# EAGLE board Placa 2 (EAGLE 7.2.0)
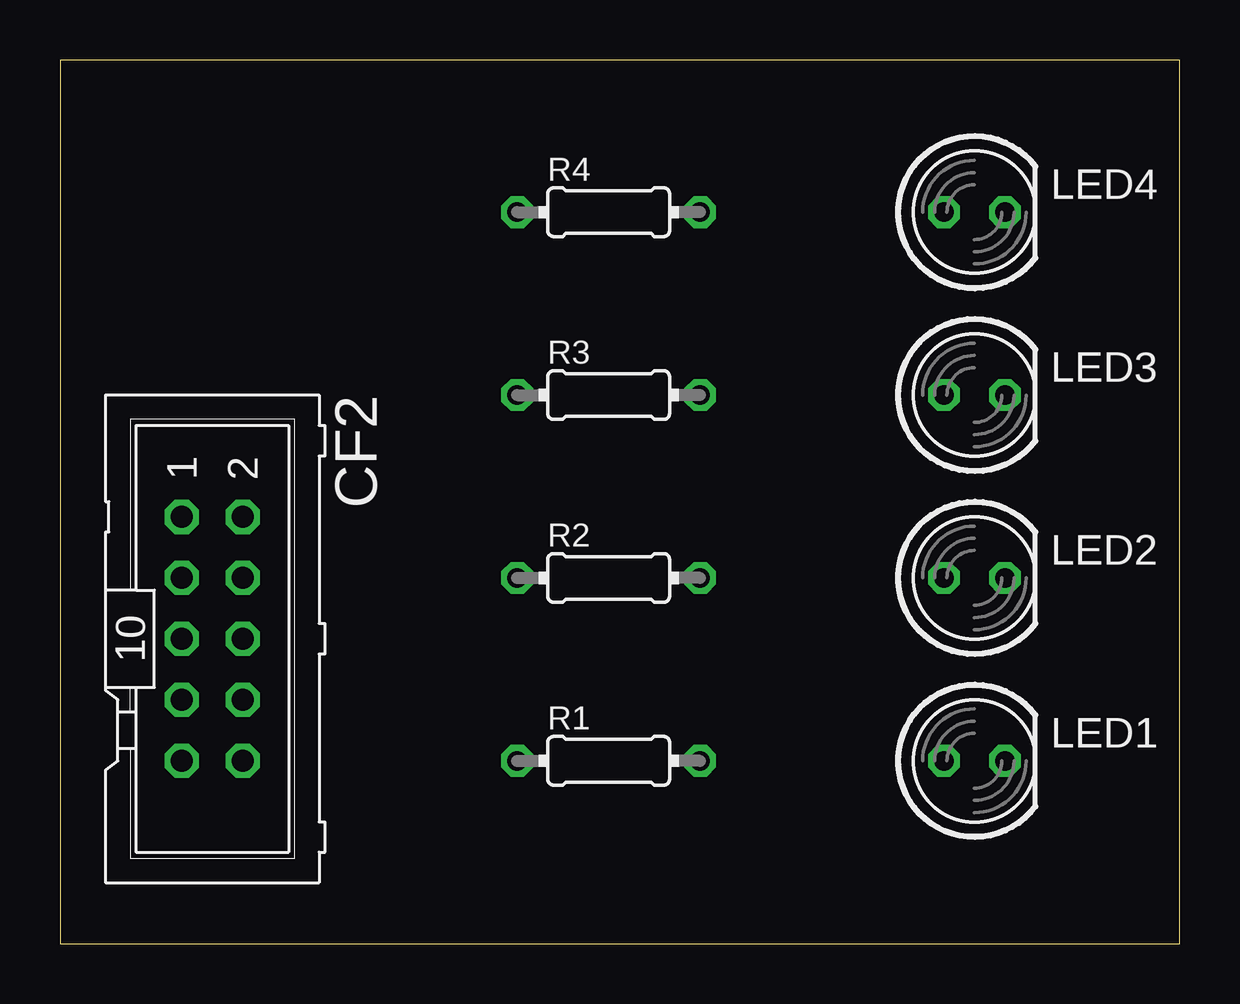
[diagram p0: board, top side]
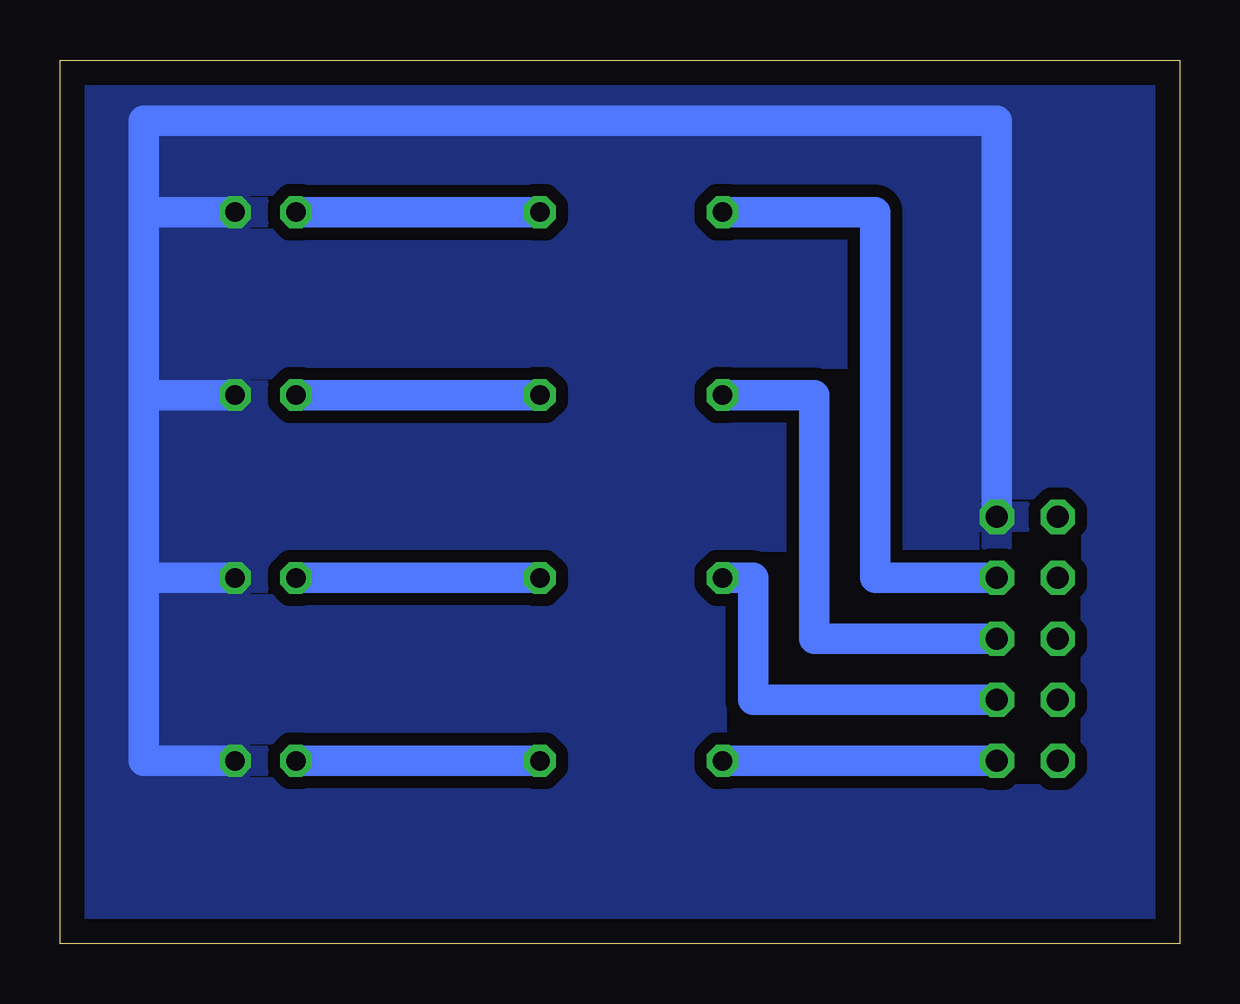
[diagram p1: board, bottom side, seen from below]

Size 46.66 x 36.82 mm. Coordinates in mm from the lower left corner, seen from the top.
Outline: 0,0 46.66,0 46.66,36.82 0,36.82 0,0
Copper layers (1*16): Top 0.035mm / dielectric 1.5mm / Bottom 0.035mm
Design rules "default *": minimum track width 10mil, minimum drill 24mil, track to track 20mil, track to pad 20mil, pad to pad 8mil, via to via 8mil, smd to smd 8mil, copper to edge 40mil, drill to drill 8mil, minimum pad ring 10mil, minimum via ring 8mil, stop-mask expansion 4mil, vias tented up to drill 0mil, thermal gap 10mil

## Footprints (pad centres in the part's own frame; a part is rotated, then mirrored left to right if it is on the bottom)
ML10 = drill 0.914 octagon: 1 -5.08,-1.27; 2 -5.08,1.27; 3 -2.54,-1.27; 4 -2.54,1.27; 5 0,-1.27; 6 0,1.27; 7 2.54,-1.27; 8 2.54,1.27; 9 5.08,-1.27; 10 5.08,1.27
LED5MM = drill 0.813 octagon: A -1.27,0; K 1.27,0
0204/7 = drill 0.813 octagon: 1 -3.81,0; 2 3.81,0

## Placement (x,y rotation side)
CF2  [ML10]  6.35,12.7 270 top
LED1  [LED5MM]  38.1,7.62 0 top
LED2  [LED5MM]  38.1,15.24 0 top
LED3  [LED5MM]  38.1,22.86 0 top
LED4  [LED5MM]  38.1,30.48 0 top
R1  220  [0204/7]  22.86,7.62 0 top
R2  220  [0204/7]  22.86,15.24 0 top
R3  220  [0204/7]  22.86,22.86 0 top
R4  220  [0204/7]  22.86,30.48 0 top

## Library data of the parts
CF2 = con-ml; OC_FARNELL: unknown; OC_NEWARK: unknown
LED1-LED4 = led
R1-R4 = rcl

## Nets
GND: CF2.2 LED1.K LED2.K LED3.K LED4.K
N$1: LED1.A R1.2
N$2: LED2.A R2.2
N$3: LED3.A R3.2
N$4: LED4.A R4.2
N$5: CF2.10 R1.1
N$6: CF2.8 R2.1
N$7: CF2.6 R3.1
N$8: CF2.4 R4.1

## Tracks (layer width: path | path; a pad name or v marks a point on that pad's centre or on a via)
GND
  Bottom 1.27: CF2.2 7.62,34.29 43.18,34.29 43.18,30.48 | 43.18,30.48 43.18,22.86 | 43.18,22.86 43.18,15.24 | 43.18,15.24 43.18,7.62 LED1.K | LED2.K 43.18,15.24 | LED3.K 43.18,22.86 | LED4.K 43.18,30.48
  pour Bottom: 0,36.83 0,0 45.72,0 45.72,36.83
N$1
  Bottom 1.27: R1.2 LED1.A
N$2
  Bottom 1.27: R2.2 LED2.A
N$3
  Bottom 1.27: LED3.A R3.2
N$4
  Bottom 1.27: LED4.A R4.2
N$5
  Bottom 1.27: CF2.10 R1.1
N$6
  Bottom 1.27: CF2.8 17.78,10.16 17.78,15.24 R2.1
N$7
  Bottom 1.27: CF2.6 15.24,12.7 15.24,22.86 R3.1
N$8
  Bottom 1.27: CF2.4 12.7,15.24 12.7,30.48 R4.1